# Altium PCB Probe.PcbDoc (part 2 of 2)
Units mil, origin at the board's own origin, x right, y up, seen from the top; angles counter-clockwise.
Board outline 2992.13 x 787.4 mil, 4 copper layers (Top, Ground, Signal/Power, Bottom), stack 59.68 mil thick; 57 components, 32 nets, 157 pads, 214 vias.
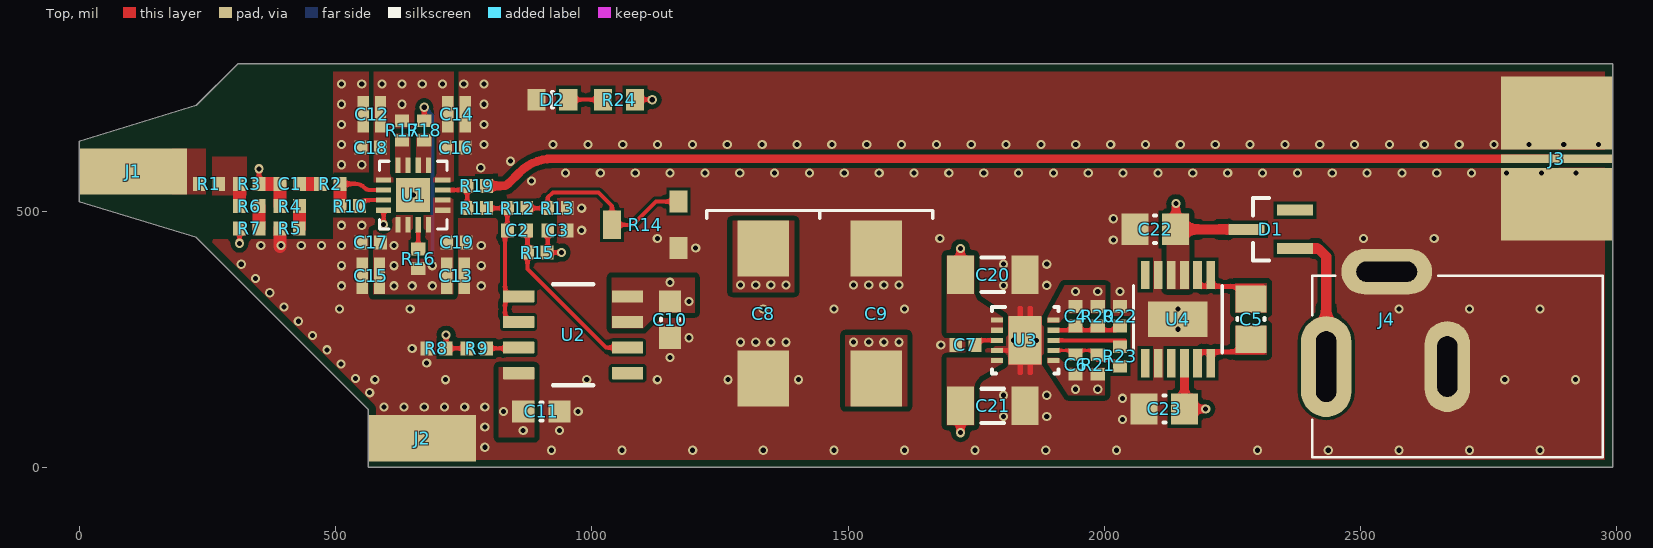
[diagram p0: Top view]

## Polygon pours and split planes (outlines as drawn) (continued)
VDD on Top "VDD_L01_P034" (solid, pour order 34): 574.8,556.1 574.8,787.4 730.31,787.4 730.32,556.1
VSS on Top "VSS_L01_P045" (solid, pour order 45): 1495.08,258.27 1495.08,119.49 1615.16,119.49 1615.16,258.27
VDD on Top "VDD_L01_P047" (solid, pour order 47): 1394.69,342.13 1394.69,480.91 1274.61,480.91 1274.61,342.13
VDD on Top "VDD_L01_P048" (solid, pour order 48): 1100.39,271.65 1130.91,302.17 1200.79,302.17 1200.79,370.08 1039.37,370.08 1039.37,271.65
VSS on Top "VSS_L01_P046" (solid, pour order 46): 818.9,195.87 887.8,195.87 887.8,59.06 818.9,59.06
V+ on Top "V+_L01_P037" (solid, pour order 37): 2165.35,495.08 2122.05,495.08 2122.05,347.44 2165.35,347.44
V+ on Top "V+_L01_P036" (solid, pour order 36): 1746.06,413.39 1692.91,413.39 1692.91,262.8 1802.17,262.8 1802.17,293.31 1752.95,325.79 1750.93,327.81 1746.06,339.57
VDD on Top "VDD_L01_P042" (solid, pour order 42): 1912.4,282.48 1928.15,301.18 2001.82,301.18 2001.82,355.32 1923.23,355.32 1888.78,292.32 1888.78,282.48
VSS on Top "VSS_L01_P040" (solid, pour order 40): 1930.12,140.75 1888.78,203.74 1888.78,213.58 1912.4,213.58 1930.12,194.88 2000.98,194.88 2000.98,140.75
NetC5_2 on Top "NETC5_2_L01_P039" (solid, pour order 39): 2255.91,219.49 2316.93,219.49 2316.93,276.57 2255.91,276.57
NetC5_1 on Top "NETC5_1_L01_P038" (solid, pour order 38): 2255.91,302.17 2255.91,359.25 2316.93,359.25 2316.93,302.17
V- on Top "V-_L01_P043" (solid, pour order 43): 1802.17,203.74 1768.7,184.06 1759.97,178.92 ccw(c1778.89,151.42) 1746.06,157.48 1746.06,82.68 1692.91,82.68 1692.91,213.58 1802.17,213.58
NetR18_1 on Top "NETR18_1_L01_P030" (solid, pour order 30): 657.48,574.8 657.48,651.57 687.01,651.57 687.01,574.8
NetR17_1 on Top "NETR17_1_L01_P031" (solid, pour order 31): 616.14,574.8 645.67,574.8 645.67,651.57 616.14,651.57
NetR1_2 on Top "NETR1_2_L01_P033" (solid, pour order 33): 259.84,531.5 326.77,531.5 326.77,606.3 259.84,606.3
TIP on Top "TIP_L01_P032" (solid, pour order 32): 180.12,622.05 247.05,622.05 247.05,533.46 180.12,533.46
GND on Ground "GND_L02_P051" (solid, pour order 51): 495.39,444.88 231.3,444.88 231.3,0 2992.13,0 2992.13,787.4 495.39,787.4
GUARD on Ground "GUARD_L02_P050" (solid, pour order 50): 259.84,531.5 326.77,531.5 326.77,606.3 259.84,606.3
VSS on Signal/Power "VSS_L03_P054" (solid, pour order 54): 2992.13,0 2992.13,787.4 495.39,787.4 495.39,0
VDD on Signal/Power "VDD_L03_P053" (solid, pour order 53): 1011.81,486.95 1011.81,282.48 2992.13,282.48 2992.13,787.4 495.39,787.4 495.39,486.95
GND on Bottom "GND_L04_P052" (solid, pour order 52): 495.39,444.88 232.28,444.88 232.28,0 495.39,0 2992.13,0 2992.13,787.4 495.39,787.4

## Other copper
Top:
  pour cut-out: 568.67,576.02 568.67,551.18 618.5,551.18 618.5,486.95 495.39,486.95 495.39,576.02
Signal/Power:
  pour cut-out: 618.5,486.95 495.39,486.95 495.39,576.02 618.5,576.02
Ground:
  region net GND: 2992.13,649.61 2992.13,555.12 2976.38,555.12 2976.38,649.61
  pour cut-out: 618.5,486.95 495.39,486.95 495.39,576.02 618.5,576.02
Bottom:
  pour cut-out: 618.5,486.95 495.39,486.95 495.39,576.02 618.5,576.02

## Silkscreen, mask and mechanical layers (free items; w line width, h text height)
Bottom Overlay:
  text "SIGNAL INPUT / MAXIMUM +/- 30 V" at 1158.46,614.17 h40
  text "BUF802 ACTIVE PROBE / PROTO 1 / JAMES WILSON 2023" at 2826.77,553.15 h40
  text "We" at 1996.06,523.62 h236.22
  text "DC POWER / MAXIMUM 32 V" at 2322.83,192.91 h40
Mechanical 1:
  the board outline again, w3.94

## Text inside footprints (layer, text, board x,y; h text height)
U1: Mechanical 8 "*" at 541.07,545.87 h50